# EAGLE board CT_schematic (EAGLE 7.6.0)

Size 100 x 80 mm. Coordinates in mm from the lower left corner, seen from the top.
Outline: 0,0 100,0 100,80 0,80 0,0
Copper layers (1*16): Top 0.035mm / dielectric 1.5mm / Bottom 0.035mm
Design rules "default": minimum track width 10mil, minimum drill 24mil, track to track 8mil, track to pad 8mil, pad to pad 8mil, via to via 8mil, smd to smd 8mil, copper to edge 40mil, drill to drill 8mil, minimum pad ring 10mil, minimum via ring 8mil, stop-mask expansion 4mil, vias tented up to drill 0mil, thermal gap 10mil

## Footprints (pad centres in the part's own frame; a part is rotated, then mirrored left to right if it is on the bottom)
C0603 = smd 0.8 x 0.8: 1 -0.762,0; 2 0.762,0
C0402 = smd 0.5 x 0.5: 1 -0.508,0; 2 0.508,0
C0805 = smd 1.2 x 1.3: 1 -1.016,0; 2 1.016,0
C1210 = smd 1.2 x 2.5: 1 -1.524,0; 2 1.524,0
C1206 = smd 1.3 x 1.6: 1 -1.524,0; 2 1.524,0
L0603 = smd 0.8 x 0.8: 1 -0.762,0; 2 0.762,0
R0603 = smd 0.8 x 0.8: 1 -0.762,0; 2 0.762,0
WLCSP36 = smd 0.229 x 0.229: A1 -1,1; A2 -0.6,1; A3 -0.2,1; A4 0.2,1; A5 0.6,1; A6 1,1; B1 -1,0.6; B2 -0.6,0.6; B3 -0.2,0.6; B4 0.2,0.6; B5 0.6,0.6; B6 1,0.6; C1 -1,0.2; C2 -0.6,0.2; C3 -0.2,0.2; C4 0.2,0.2; C5 0.6,0.2; C6 1,0.2; D1 -1,-0.2; D2 -0.6,-0.2; D3 -0.2,-0.2; D4 0.2,-0.2; D5 0.6,-0.2; D6 1,-0.2; E1 -1,-0.6; E2 -0.6,-0.6; E3 -0.2,-0.6; E4 0.2,-0.6; E5 0.6,-0.6; E6 1,-0.6; F1 -1,-1; F2 -0.6,-1; F3 -0.2,-1; F4 0.2,-1; F5 0.6,-1; F6 1,-1
SOIC-8 = smd 1.6 x 0.6: 1 -2.7,1.905 | smd 1.55 x 0.6: 2 -2.7,0.635; 3 -2.7,-0.635; 4 -2.7,-1.905; 5 2.7,-1.905; 6 2.7,-0.635; 7 2.7,0.635; 8 2.7,1.905
M41T65_QFN-16 = smd 0.775 x 0.305: 1 -1.387,0.75; 2 -1.387,0.25; 3 -1.387,-0.25; 4 -1.387,-0.75; 9 1.387,-0.75; 10 1.387,-0.25; 11 1.387,0.25; 12 1.387,0.75 | smd 0.305 x 0.775: 5 -0.75,-1.387; 6 -0.25,-1.387; 7 0.25,-1.387; 8 0.75,-1.387; 13 0.75,1.387; 14 0.25,1.387; 15 -0.25,1.387; 16 -0.75,1.387 | smd 1.6 x 1.6: 17 0,0
ABS07-32.768KHZ-7-T = smd 1.1 x 2.4: 1 -2.5,0; 2 0,0
ASFL1 = smd 1.7 x 1.5: 1 -1.27,-1.1; 2 1.27,-1.1; 3 1.27,1.1; 4 -1.27,1.1
SOIC-8_EP = smd 1.6 x 0.533: 1 -2.921,1.905; 2 -2.921,0.635; 3 -2.921,-0.635; 4 -2.921,-1.905; 5 2.921,-1.905; 6 2.921,-0.635; 7 2.921,0.635; 8 2.921,1.905 | smd 2.54 x 3.302: EPAD 0,0 | drill 0.406 pad 0.406: P$1 -0.508,0.635; P$2 0.381,0.635; P$3 -0.508,-0.635; P$4 0.381,-0.635
DFN8_2X3MC = smd 0.813 x 0.305: 1 -1.398,0.75; 2 -1.398,0.25; 3 -1.398,-0.25; 4 -1.398,-0.75; 5 1.398,-0.75; 6 1.398,-0.25; 7 1.398,0.25; 8 1.398,0.75 | smd 1.753 x 1.549: 9 0,0
JST-2-SMD = smd 1 x 4.6: 1 -1,-3.7; 2 1,-3.7 | smd 1.6 x 3.4: NC1 -3.4,1.5; NC2 3.4,1.5
FCI_10118193-0001LF = smd 0.4 x 1.35: 1 -1.3,2.675; 2 -0.65,2.675; 3 0,2.675; 4 0.65,2.675; 5 1.3,2.675 | smd 1.6 x 1.4: 6 -3.2,2.45; 7 3.2,2.45 | smd 1.9 x 1.9: 8 -1.2,0; 9 1.2,0 | hole 0.5: -3.3,0; 3.3,0
SON-6 = smd 0.55 x 0.3: 1 -0.355,0.5 | smd 0.52 x 0.3: 2 -0.37,0; 3 -0.37,-0.5; 4 0.37,-0.5; 5 0.37,0; 6 0.37,0.5
SW_4-1437565-2 = smd 1.4 x 2.1: 1 -2.23,4.55; 2 -2.23,-4.55; 3 2.23,4.55; 4 2.23,-4.55
LGM67K-G1J2-24-Z = smd 0.8 x 1.4: A -2,0; C 0,0
NC7SZ125M5X = smd 1.3 x 0.7: 1 -1.3,0.95; 2 -1.3,0; 3 -1.3,-0.95; 4 1.3,-0.95; 5 1.3,0.95

## Placement (x,y rotation side)
C1  1e-06  [C0603]  -52.07,43.18 0 top  (outside the outline)
C2  1e-07  [C0603]  -55.88,43.18 0 top  (outside the outline)
C3  1e-07  [C0603]  -59.69,43.18 0 top  (outside the outline)
C4  1e-07  [C0603]  -15.24,48.26 0 top  (outside the outline)
C5  1e-07  [C0603]  -19.05,48.26 0 top  (outside the outline)
C6  1e-07  [C0603]  -22.86,48.26 0 top  (outside the outline)
C7  4.7e-06  [C0603]  -44.45,43.18 0 top  (outside the outline)
C8  2.2e-06  [C0603]  -48.26,43.18 0 top  (outside the outline)
C9  1e-08  [C0603]  -26.67,48.26 0 top  (outside the outline)
C10  1e-06  [C0603]  -30.48,48.26 0 top  (outside the outline)
C11  1e-11  [C0402]  -22.86,53.34 0 top  (outside the outline)
C12  1e-11  [C0402]  -26.67,53.34 0 top  (outside the outline)
C13  1e-08  [C0402]  -30.48,53.34 0 top  (outside the outline)
C14  4.7e-06  [C0805]  -59.69,31.75 0 top  (outside the outline)
C15  1e-08  [C0402]  -34.29,53.34 0 top  (outside the outline)
C16  1e-05  [C1210]  -57.15,25.4 0 top  (outside the outline)
C17  1e-05  [C1210]  -16.51,33.02 0 top  (outside the outline)
C18  1e-05  [C1210]  -22.86,33.02 0 top  (outside the outline)
C19  1e-05  [C1210]  -29.21,33.02 0 top  (outside the outline)
C20  1e-07  [C0402]  -38.1,53.34 0 top  (outside the outline)
C21  1e-05  [C1206]  -41.91,33.02 0 top  (outside the outline)
C22  1e-05  [C1206]  -48.26,33.02 0 top  (outside the outline)
C23  1e-08  [C0402]  -41.91,53.34 0 top  (outside the outline)
F1  240.0  [L0603]  -34.29,48.26 0 top  (outside the outline)
R1  10000.0  [R0603]  -34.29,38.1 0 top  (outside the outline)
R2  1000.0  [R0603]  -38.1,48.26 0 top  (outside the outline)
R3  1600.5  [R0603]  -41.91,48.26 0 top  (outside the outline)
R4  4700.0  [R0603]  -45.72,48.26 0 top  (outside the outline)
R5  2200.0  [R0603]  -49.53,48.26 0 top  (outside the outline)
R6  2200.0  [R0603]  -53.34,48.26 0 top  (outside the outline)
R7  10000.0  [R0603]  -39.37,38.1 0 top  (outside the outline)
R8  10000.0  [R0603]  -44.45,38.1 0 top  (outside the outline)
R9  10000.0  [R0603]  -49.53,38.1 0 top  (outside the outline)
R10  10000.0  [R0603]  -54.61,38.1 0 top  (outside the outline)
R11  10000.0  [R0603]  -59.69,38.1 0 top  (outside the outline)
R12  10000.0  [R0603]  -15.24,43.18 0 top  (outside the outline)
R13  10000.0  [R0603]  -20.32,43.18 0 top  (outside the outline)
R14  10000.0  [R0603]  -25.4,43.18 0 top  (outside the outline)
R15  4031.5447154472  [R0603]  -19.05,38.1 0 top  (outside the outline)
R16  2200.0  [R0603]  -57.15,48.26 0 top  (outside the outline)
R17  10000.0  [R0603]  -30.48,43.18 0 top  (outside the outline)
R18  10000.0  [R0603]  -35.56,43.18 0 top  (outside the outline)
R19  9100.0  [R0603]  -15.24,53.34 0 top  (outside the outline)
R20  680000.0  [R0603]  -24.13,38.1 0 top  (outside the outline)
R21  120000.0  [R0603]  -29.21,38.1 0 top  (outside the outline)
R22  2000.0  [R0603]  -19.05,53.34 0 top  (outside the outline)
R23  10000.0  [R0603]  -40.64,43.18 0 top  (outside the outline)
U1  STM32F410TBY6  [WLCSP36]  -34.29,31.75 0 top  (outside the outline)
U2  AT25640B-SSHL-T  [SOIC-8]  -58.42,5.08 0 top  (outside the outline)
U3  M41T65Q6F  [M41T65_QFN-16]  -46.99,53.34 0 top  (outside the outline)
U4  ABS07-32.768KHZ-7-T  [ABS07-32.768KHZ-7-T]  -55.88,16.51 0 top  (outside the outline)
U5  ABS07-32.768KHZ-7-T  [ABS07-32.768KHZ-7-T]  -27.94,25.4 0 top  (outside the outline)
U6  ASFL1-25MHZ-NCS  [ASFL1]  -26.67,16.51 0 top  (outside the outline)
U7  MIC5234YME  [SOIC-8_EP]  -36.83,25.4 0 top  (outside the outline)
U8  MCP73831T-2ACI/MC  [DFN8_2X3MC]  -58.42,52.07 0 top  (outside the outline)
U9  S2B-PH-SM4-TB(LF)(SN)  [JST-2-SMD]  -41.91,6.35 0 top  (outside the outline)
U10  10118193-0001LF  [FCI_10118193-0001LF]  -35.56,16.51 0 top  (outside the outline)
U11  TPS3895ADRYR  [SON-6]  -52.07,52.07 0 top  (outside the outline)
U12  4-1437565-2  [SW_4-1437565-2]  -27.94,6.35 0 top  (outside the outline)
U13  Q65110A2395  [LGM67K-G1J2-24-Z]  -45.72,25.4 0 top  (outside the outline)
U14  nc7sz125m5x  [NC7SZ125M5X]  -53.34,31.75 0 top  (outside the outline)

## Library data of the parts
C1-C23 F1 R1-R23 U1-U14 = circuit_tree

## Nets
CLK_CRYSTAL_U1_B6: C11.1 U1.B6 U5.1
CLK_CRYSTAL_U1_C6: C12.1 U1.C6 U5.2
CLK_CRYSTAL_U3_1: U3.1 U4.1
CLK_CRYSTAL_U3_2: U3.2 U4.2
CLK_U1_C5: U1.C5 U6.3
GND: C1.2 C2.2 C3.2 C4.2 C5.2 C6.2 C7.2 C8.2 C9.2 C10.2 C11.2 C12.2 C13.2 C14.2 C15.2 C16.2 C17.2 C18.2 C19.2 C20.2 C21.2 C22.2 C23.2 R2.2 R8.2 R16.2 R19.2 R21.2 R22.2 U1.A5 U1.B1 U1.E6 U1.F2 U2.4 U3.3 U3.5 U3.17 U6.2 U7.7 U7.EPAD U8.6 U8.9 U9.2 U10.5 U10.6 U10.7 U10.8 U10.9 U11.2 U13.C U14.1 U14.3
INPUT_USBPOWER_5V: C21.1 R23.2 U8.1 U8.2 U10.1
NET_U1_A4: R5.1 U1.A4 U3.10
NET_U1_B4: R7.1 R9.1 U1.B4
NET_U1_C3: R6.1 U1.C3 U3.9
NET_U1_D4: R8.1 U1.D4
NET_U1_D5: R4.1 U1.D5 U14.4
NET_U1_E2: C8.1 U1.E2
NET_U1_F4: R3.1 U1.F4 U13.A
NET_U1_F5: R1.1 U1.F5 U12.3 U12.4
NET_U1_F6: C9.1 C10.1 F1.1 U1.F6
NET_U2_3: R10.1 U2.3
NET_U2_7: R12.1 U2.7
NET_U3_4: R13.1 U3.4
NET_U3_11: R14.1 U3.11
NET_U7_4: R15.2 R16.1 U7.4
NET_U8_5: R23.1 U8.5
NET_U8_8: R22.1 U8.8
NET_U11_1: R18.1 R19.1 U11.1
NET_U11_3: R20.2 R21.1 U11.3
NET_U11_4: R17.1 U11.4 U14.2
NET_U12_1: R2.1 U12.1 U12.2
PROC_SPI1_MISO: U1.D3 U2.2
PROC_SPI1_MOSI: U1.A3 U2.5
PROC_SPI1_NSS: R11.1 U1.A2 U2.1
PROC_SPI1_SCK: U1.C2 U2.6
VCC_S1_3V7: C16.1 C17.1 C22.1 U7.5 U7.8 U8.3 U8.4 U9.1
VCC_TIER1_3V3: C1.1 C2.1 C3.1 C4.1 C5.1 C6.1 C7.1 C13.1 C14.1 C15.1 C18.1 C19.1 C20.1 C23.1 F1.2 R1.2 R3.2 R4.2 R5.2 R6.2 R7.2 R9.2 R10.2 R11.2 R12.2 R13.2 R14.2 R15.1 R17.2 R18.2 R20.1 U1.A1 U1.A6 U1.B5 U1.F1 U2.8 U3.14 U6.4 U7.1 U11.6 U14.5

## Tracks (layer width: path | path; a pad name or v marks a point on that pad's centre or on a via)
CLK_CRYSTAL_U1_B6  (2 unrouted)
CLK_CRYSTAL_U1_C6  (2 unrouted)
CLK_CRYSTAL_U3_1  (1 unrouted)
CLK_CRYSTAL_U3_2  (1 unrouted)
CLK_U1_C5  (1 unrouted)
GND  (51 unrouted)
INPUT_USBPOWER_5V  (4 unrouted)
NET_U1_A4  (2 unrouted)
NET_U1_B4  (2 unrouted)
NET_U1_C3  (2 unrouted)
NET_U1_D4  (1 unrouted)
NET_U1_D5  (2 unrouted)
NET_U1_E2  (1 unrouted)
NET_U1_F4  (2 unrouted)
NET_U1_F5  (3 unrouted)
NET_U1_F6  (3 unrouted)
NET_U2_3  (1 unrouted)
NET_U2_7  (1 unrouted)
NET_U3_4  (1 unrouted)
NET_U3_11  (1 unrouted)
NET_U7_4  (2 unrouted)
NET_U8_5  (1 unrouted)
NET_U8_8  (1 unrouted)
NET_U11_1  (2 unrouted)
NET_U11_3  (2 unrouted)
NET_U11_4  (2 unrouted)
NET_U12_1  (2 unrouted)
PROC_SPI1_MISO  (1 unrouted)
PROC_SPI1_MOSI  (1 unrouted)
PROC_SPI1_NSS  (2 unrouted)
PROC_SPI1_SCK  (1 unrouted)
VCC_S1_3V7  (7 unrouted)
VCC_TIER1_3V3  (40 unrouted)